# Altium PCB PCB1.PcbDoc
Units mil, origin at the board's own origin, x right, y up, seen from the top; angles counter-clockwise.
Board outline 1655 x 730 mil, 2 copper layers (Top Layer, Bottom Layer); 8 components, 5 nets, 21 pads, 4 vias.
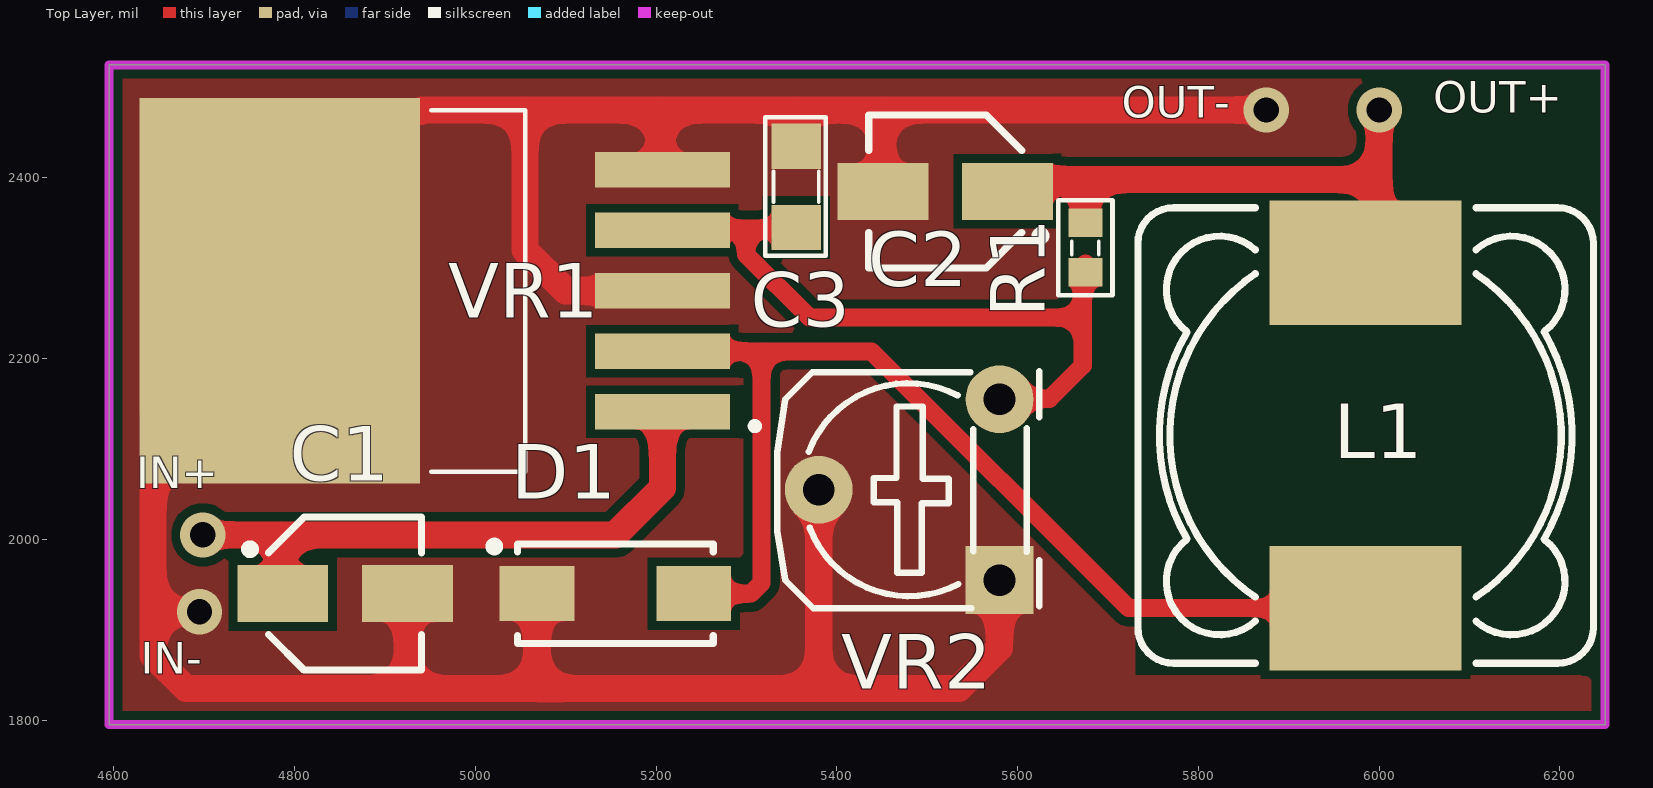
[diagram p0: Top Layer view]
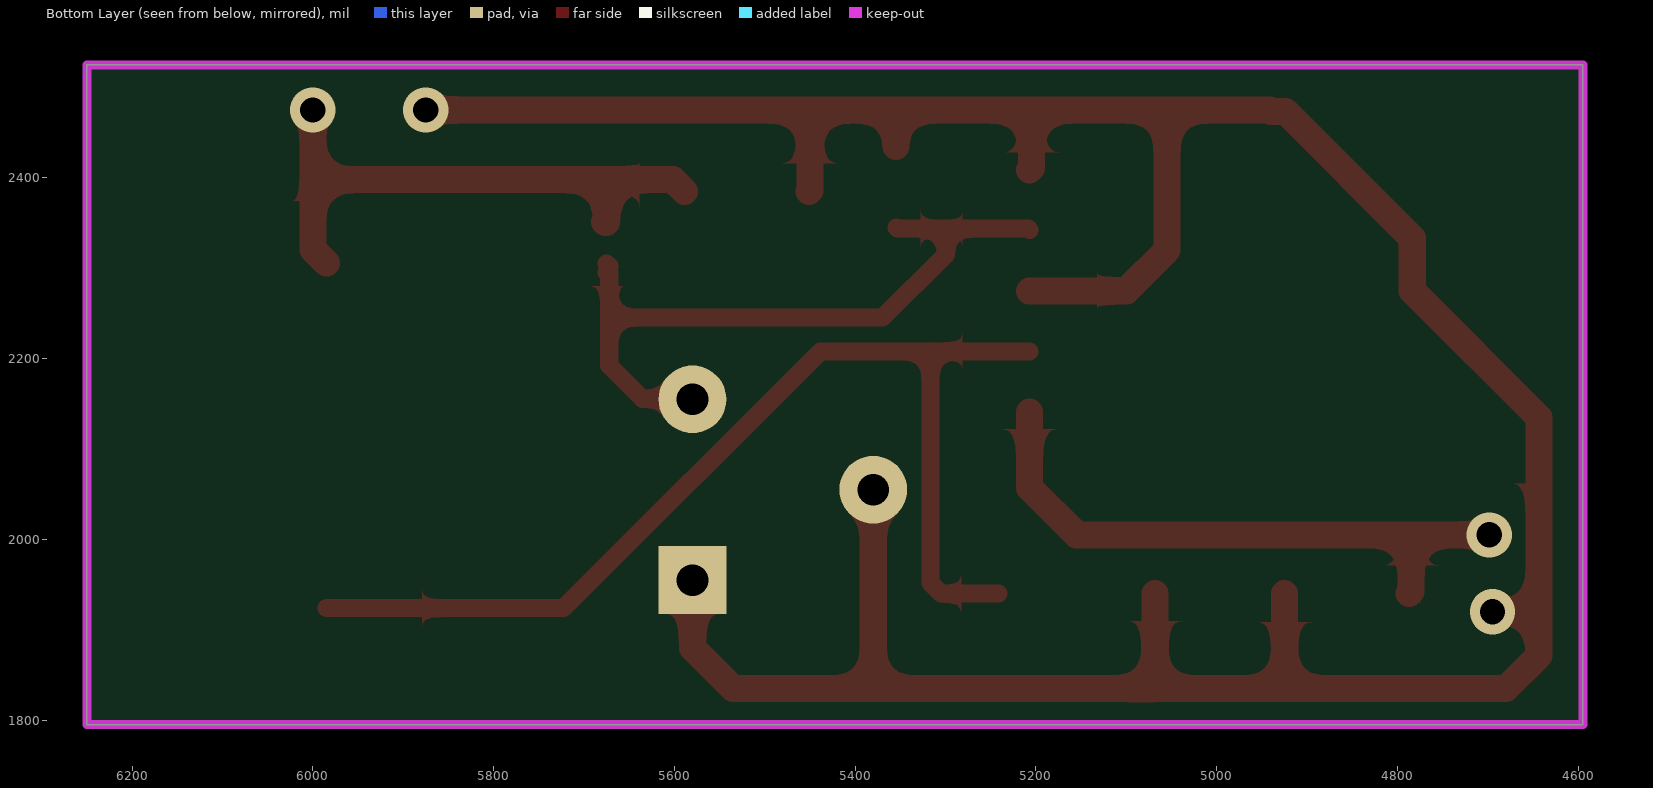
[diagram p1: Bottom Layer view, seen from below]
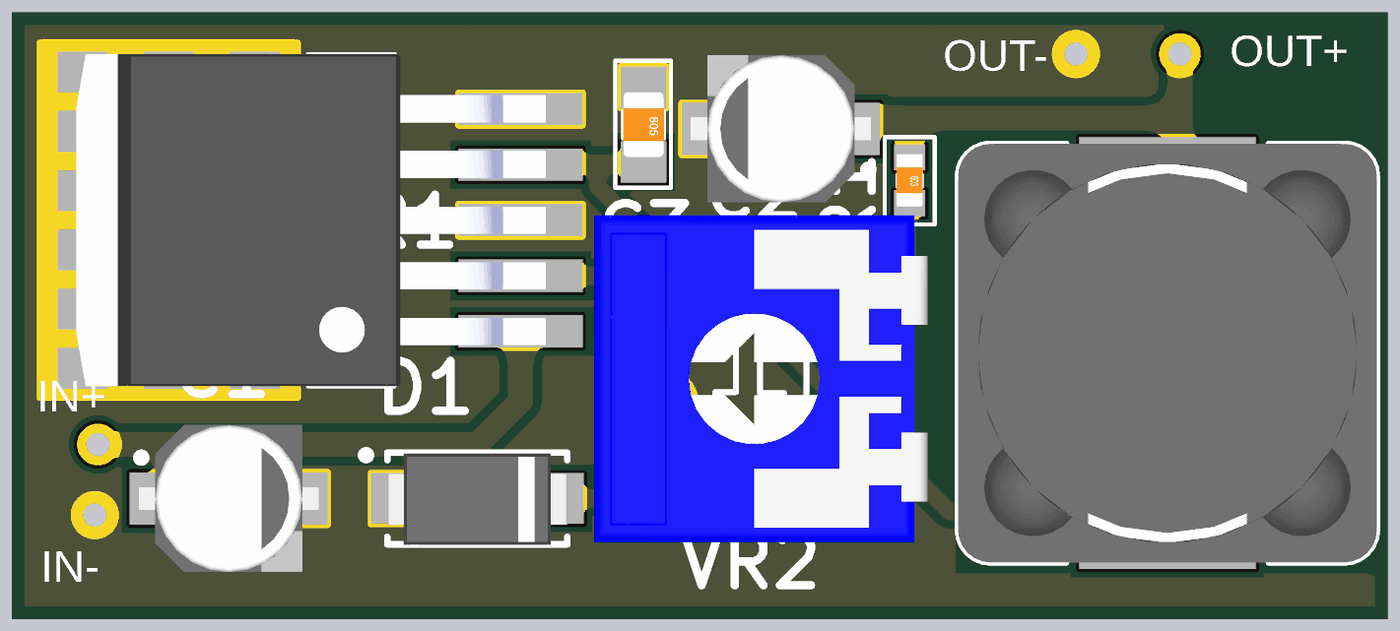
[diagram p2: 3D render of the assembled board from above, using the file's embedded part models]

## Layer stack, top to bottom
Top Solder: solder mask 0.4, Solder Resist, Dk 3.5
Top Layer: signal copper 1.4
Dielectric 1: dielectric 12.6, FR-4, Dk 4.8
Bottom Layer: signal copper 1.4
Bottom Solder: solder mask 0.4, Solder Resist, Dk 3.5

## Board outline
4595,1795 4595,2525 6250,2525 6250,1795

## Design rules (kind name [scope] priority, off if disabled: settings)
Clearance [All] p1: gap=10 ignorepadtopadclearanceinfootprint=FALSE except(0: Arc-Hole Track-Hole SMDPad-Hole THPad-Hole Via-Hole Fill-Hole Poly-Hole Region-Hole Text-Hole; 15: Arc-Arc Arc-Track Arc-SMDPad Arc-THPad Arc-Via Track-Track Track-SMDPad Track-THPad Track-Via SMDPad-SMDPad SMDPad-THPad SMDPad-Via THPad-THPad THPad-Via Via-Via)
PolygonConnect [All] p1: connectstyle=Direct reliefconductorwidth=10 reliefentries=4 polygonreliefangle="90 Angle" airgapwidth=10
RoutingVias [All] p1: holewidth=20 width=30 viastyle="Through Hole" minholewidth=20 minwidth=30 maxholewidth=20 maxwidth=30
SolderMaskExpansion [All] p1: expansion=4 istentingtop=FALSE
Width [All] p1: maxlimit=50 minlimit=20 preferedwidth=30
30 further rules are at their usual default settings.

## Classes and differential pairs
component class Sheet2: C1 C2 C3 D1 R1 VR1 VR2

## Components (designator, comment, footprint, x,y, rotation, side; value= is the part's Value field where it differs from the comment)
C1 "Cap Pol SMD" "CAP ALU SIZE B" 4856.1,1940 r0 top value=470uF
C2 "Cap Pol SMD" "CAP ALU SIZE B" 5520,2385 r180 top value=220uF
C3 "Cap Non-Pol SMD" CAP-SM-0805 5355,2435 r270 top value=33nF
D1 "D Schottky" SS34 5155,1940 r0 top
L1 "Inductor" "INDUCTOR 12.5x12.5" 5985,2115 r90 top value=22uH
R1 "RESISTOR SMD" RES-SM-0603 5675,2350 r270 top value=1K
VR1 "LM2596S-ADJ" TO170P1524X483-6N 4955,2275 r180 top
VR2 "10K" "Varistor 1" 5580,1955 r90 top value="VR 10K"

## Footprints (in the part's own frame and the unit in brackets; to place one, negate y for a bottom-side part, rotate by r counter-clockwise, add the part's x,y. Pads: shape width x height; smd on the part's side, far side on the other; paste and mask are expansions set on the pad)
"CAP ALU SIZE B" [mm] "Capacitor, Aluminium Electrolytric, 4.3mm L X 4.3mm W X 5.4mm H, IPC Medium Density"
  rect 2.55x1.6 smd: 1(-1.75,0) 2(1.75,0)
  silkscreen extent -2.8,-2.15 2.15,2.15, body extent -2.75,-2.25 2.75,2.25, height 5.7
CAP-SM-0805 [mil]
  rect 50x55 smd: 1(0,0) 2(90,0)
  silkscreen extent -32,-34 121,33, body extent 6,-25 84,25, height 31
"INDUCTOR 12.5x12.5" [mm] "SMD Inductor  Body Width 12.5mm Body Lenght 12.5mm Height 8mm"
  rect 3.5x5.4 smd: 1(-4.85,0) 2(4.85,0)
  silkscreen extent -6.4,-6.4 6.4,6.4, body extent -6.4,-6.4 6.4,6.4, height 8
RES-SM-0603 [mm]
  rect 0.8x0.95 smd: 1(-0.014,0) 2(1.386,0)
  silkscreen extent -0.64,-0.76 2.03,0.76, body extent -0.11,-0.4 1.49,0.4, height 0.3
SS34 [mm] "DO-214-AC/SMA Molded Diode, Body 5.3x2.6mm, IPC Medium Density"
  rect 2.1x1.55 smd: 1(-2.2,0) 2(2.2,0)
  silkscreen extent -3.52,-1.4 2.75,1.45, body extent -2.75,-1.42 2.75,1.38, height 2.3
TO170P1524X483-6N [mm]
  rect 3.79x0.99 smd: 1(-6.4,3.4) 2(-6.4,1.7) 3(-6.4,0) 4(-6.4,-1.7) 5(-6.4,-3.4)
  rect 7.88x10.84 smd paste-6: 6(4.35,0)
  silkscreen extent -9.1,-5.08 0.09,5.08, body extent -7.18,-5.08 7.18,5.08, height 4.65
"Varistor 1" [mil] "Resistor Variable"
  rect 75x75 hole 35: 1(0,0)
  round 75 hole 35: 2(100,200) 3(200,0)
  silkscreen extent -31,-44 231,246, body extent -68,-117 326,285, height 165

## Part data
C1 C2: "Polarized Capacitor (Radial)"
C3: "Capacitor"
D1: "SS54-SMB", Code_JEDEC=DO-214-AA, LatestRevisionDate=17-Jul-2002, LatestRevisionNote="Re-released for DXP Platform.", PackageDescription="DO-214-AA/SMB; 2 C-Bend Leads; Body 5.3 x 3.6 mm, inc. leads (LxW)", PackageReference=SMB, Published=8-Jun-2000, Publisher="Altium Limited"
R1: "Resistor"
VR1: library part LM2596S-5.0, "SIMPLE SWITCHER&reg; 4.5V to 40V, 3A Low Component Count Step-Down Regulator", Package="TO-263-5 Texas Instruments", Availability="In Stock", Check_prices=https://www.snapeda.com/parts/LM2596S-5.0/NOPB/Texas+Instruments/view-part/?ref=eda, MF="Texas Instruments", MP=LM2596S-5.0/NOPB, Price=None, Purchase-URL=https://pricing.snapeda.com/search/part/LM2596S-5.0/NOPB/?ref=eda, SnapEDA_Link=https://www.snapeda.com/parts/LM2596S-5.0/NOPB/Texas+Instruments/view-part/?ref=snap
VR2: library part "Var Resistor", "Var Resistor"

## Via types
v1: diameter 50, hole 28, Top Layer to Bottom Layer, 3 vias
v2: diameter 50/50 (per signal layer), hole 28, Top Layer to Bottom Layer, 1 vias

## Nets (pads, with @x,y where several pads share a name; then routed paths per layer and width w, separated by ;. In a path a pad name is that pad's centre, name@x,y a point inside that pad or via, vN(x,y) a via of type N, cw(c..) or ccw(c..) an arc to the next point about the centre after c; other vN are vias at no path point)
+12: C1.1 VR1.1 | length 680
  Top Layer w30: v1(4698.62,2005) 4785,2005 ; C1.1 4785,1942.2 4785,2005 ; VR1.1 5206.97,2056.97 5155,2005 4785,2005
GND: C1.2 C2.2 C3.1 D1.1 VR1.3 VR1.5 VR1.6 VR2.1 VR2.2 | length 3719.4
  Top Layer w30: v1(4695,1920) 4643.62,1920 ; C1.2 4925,1835 ; D1.1 5068.39,1835 ; VR1.3 5100,2275 5055,2320 5055,2475 ; VR1.5 5205,2410.83 5205,2475 ; C3.1 5355,2475 ; VR2.2 5380,1835 ; C2.2 5450,2386.1 5450,2475 ; VR2.1 5580,1880 5535,1835 5380,1835 ; v2(5875,2475) 5450,2475 ; 4643.62,1920 4643.62,2134.88 VR1.6 4783.74,2333.27 4923.86,2473.39 4939.82,2473.39 4941.43,2475 5055,2475 ; 4643.62,1920 4643.62,1871.38 4680,1835 4925,1835 ; 4925,1835 5068.39,1835 ; 5055,2475 5205,2475 ; 5068.39,1835 5380,1835 ; 5205,2475 5355,2475 ; 5355,2475 5450,2475
NetC3_2: C3.2 R1.2 VR1.4 VR2.3 | length 795.6
  Top Layer w20: VR1.4@5206.97,2342.47 5208.27,2343.78 5299.77,2343.78 ; C3.2@5354.45,2345 5353.23,2343.78 5299.77,2343.78 ; VR2.3@5580,2155.55 5635,2155.55 5672.08,2192.63 5672.08,2245.32 ; R1.2@5672.08,2302.52 R1.2@5675,2305.44 ; R1.2 5672.08,2295.44 5672.08,2245.32 ; 5299.77,2343.78 5299.77,2315.32 5369.77,2245.32 5672.08,2245.32
NetD1_2: D1.2 L1.1 VR1.2 | length 1232.2
  Top Layer w20: VR1.2 5316.93,2208.07 ; D1.2 5305.21,1940 5316.93,1951.72 5316.93,2208.07 ; L1.1 5722.56,1924.06 5438.54,2208.07 5316.93,2208.07
V_out: C2.1 L1.2 R1.1 | length 641.5
  Top Layer w30: C2.1 5601.87,2397.97 5675,2397.97 ; R1.1@5677.03,2351.31 5676.28,2350.56 R1.1 5675,2397.97 ; L1.2 6000,2320.94 6000,2397.97 ; v1(6000,2475) 6000,2397.97 ; 5675,2397.97 6000,2397.97

## Polygon pours and split planes (outlines as drawn)
GND on Top Layer "GND_L01_P000" (solid, remove dead copper, pour order 0): 4595,1795 4595,2525 6250,2525 6250,1795

## Keep-outs
Keep-Out Layer:
  the board outline again, w10

## Other copper
Top Layer:
  pour cut-out: 5730,2375 6235,2375 6235,1850 cw(c6228.96,1864.57) 6222.93,1850 5730,1850

## Silkscreen, mask and mechanical layers (free items; w line width, h text height)
Top Overlay:
  text "OUT+" at 6059.94,2460.67 h60
  text "OUT-" at 5715,2455 h60
  text "IN+" at 4624.94,2045 h60
  text "IN-" at 4629.94,1840 h60